# Altium PCB MYPCB.PcbDoc
Units mil, origin at the board's own origin, x right, y up, seen from the top; angles counter-clockwise.
Board outline 6000 x 4000 mil, 2 copper layers (Top Layer, Bottom Layer); 56 components, 75 nets, 228 pads, 46 vias.
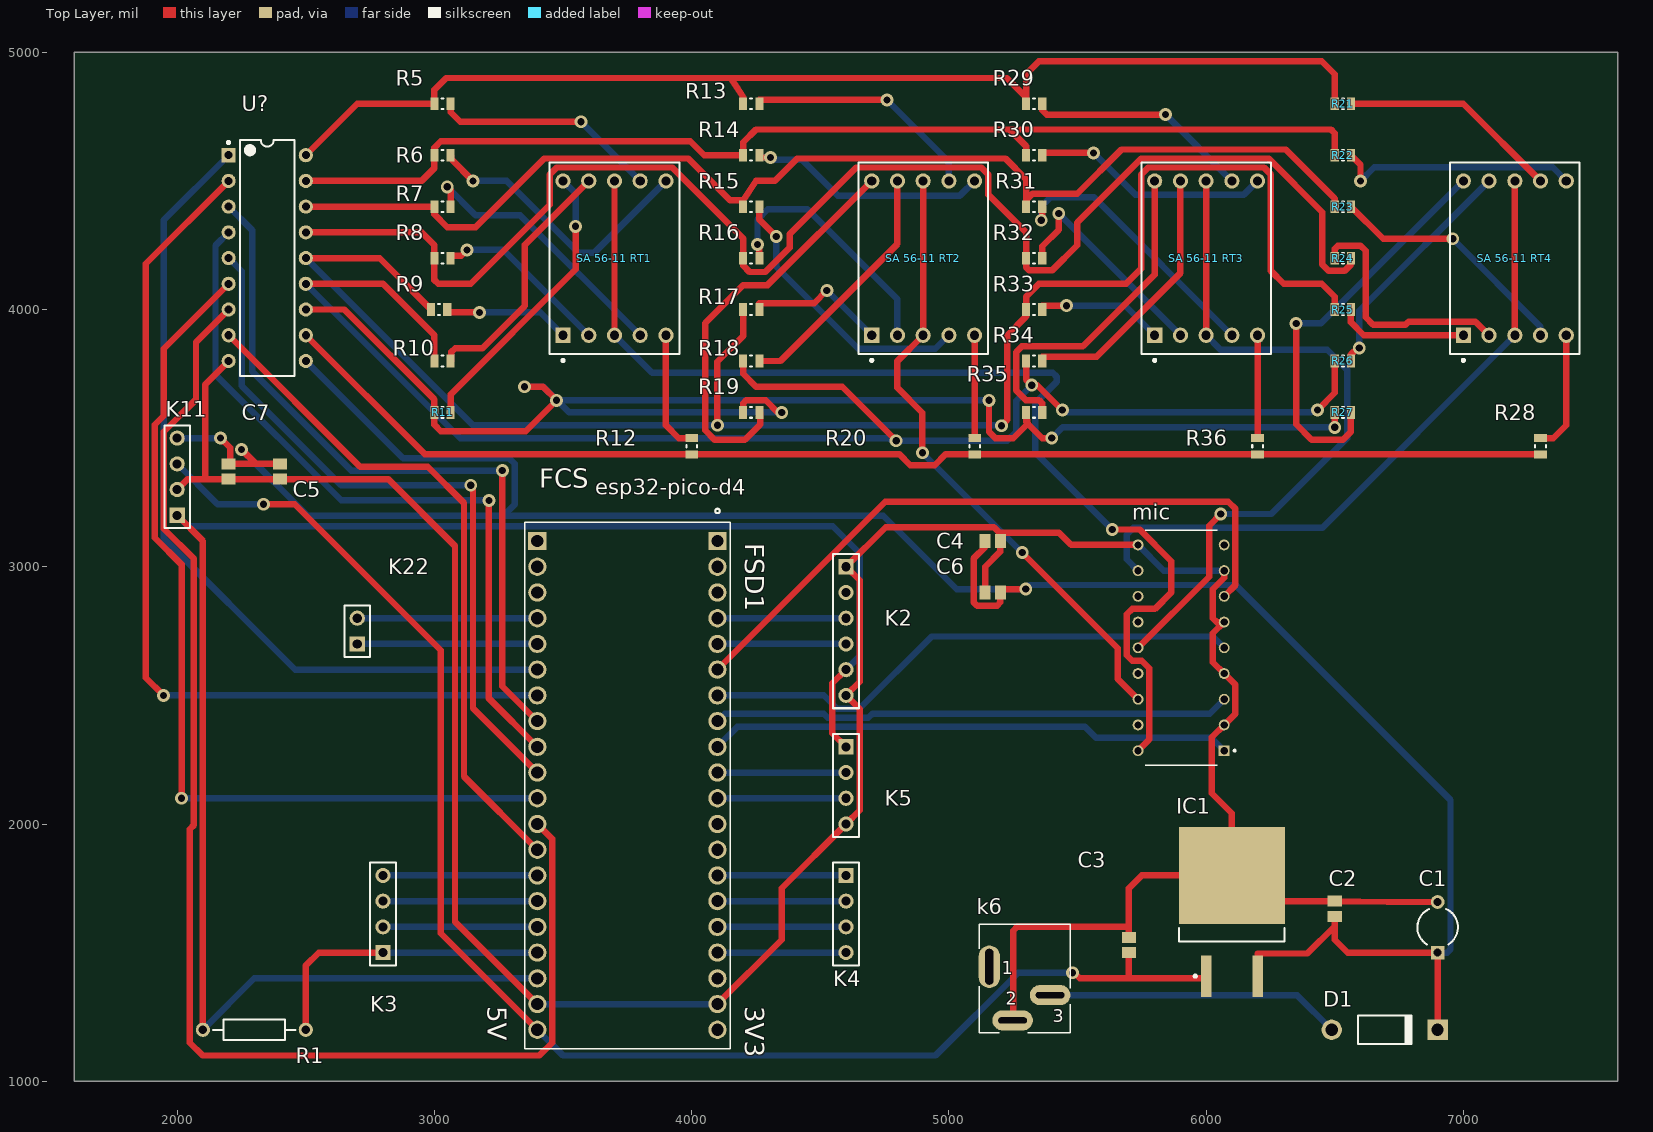
[diagram p0: Top Layer view]
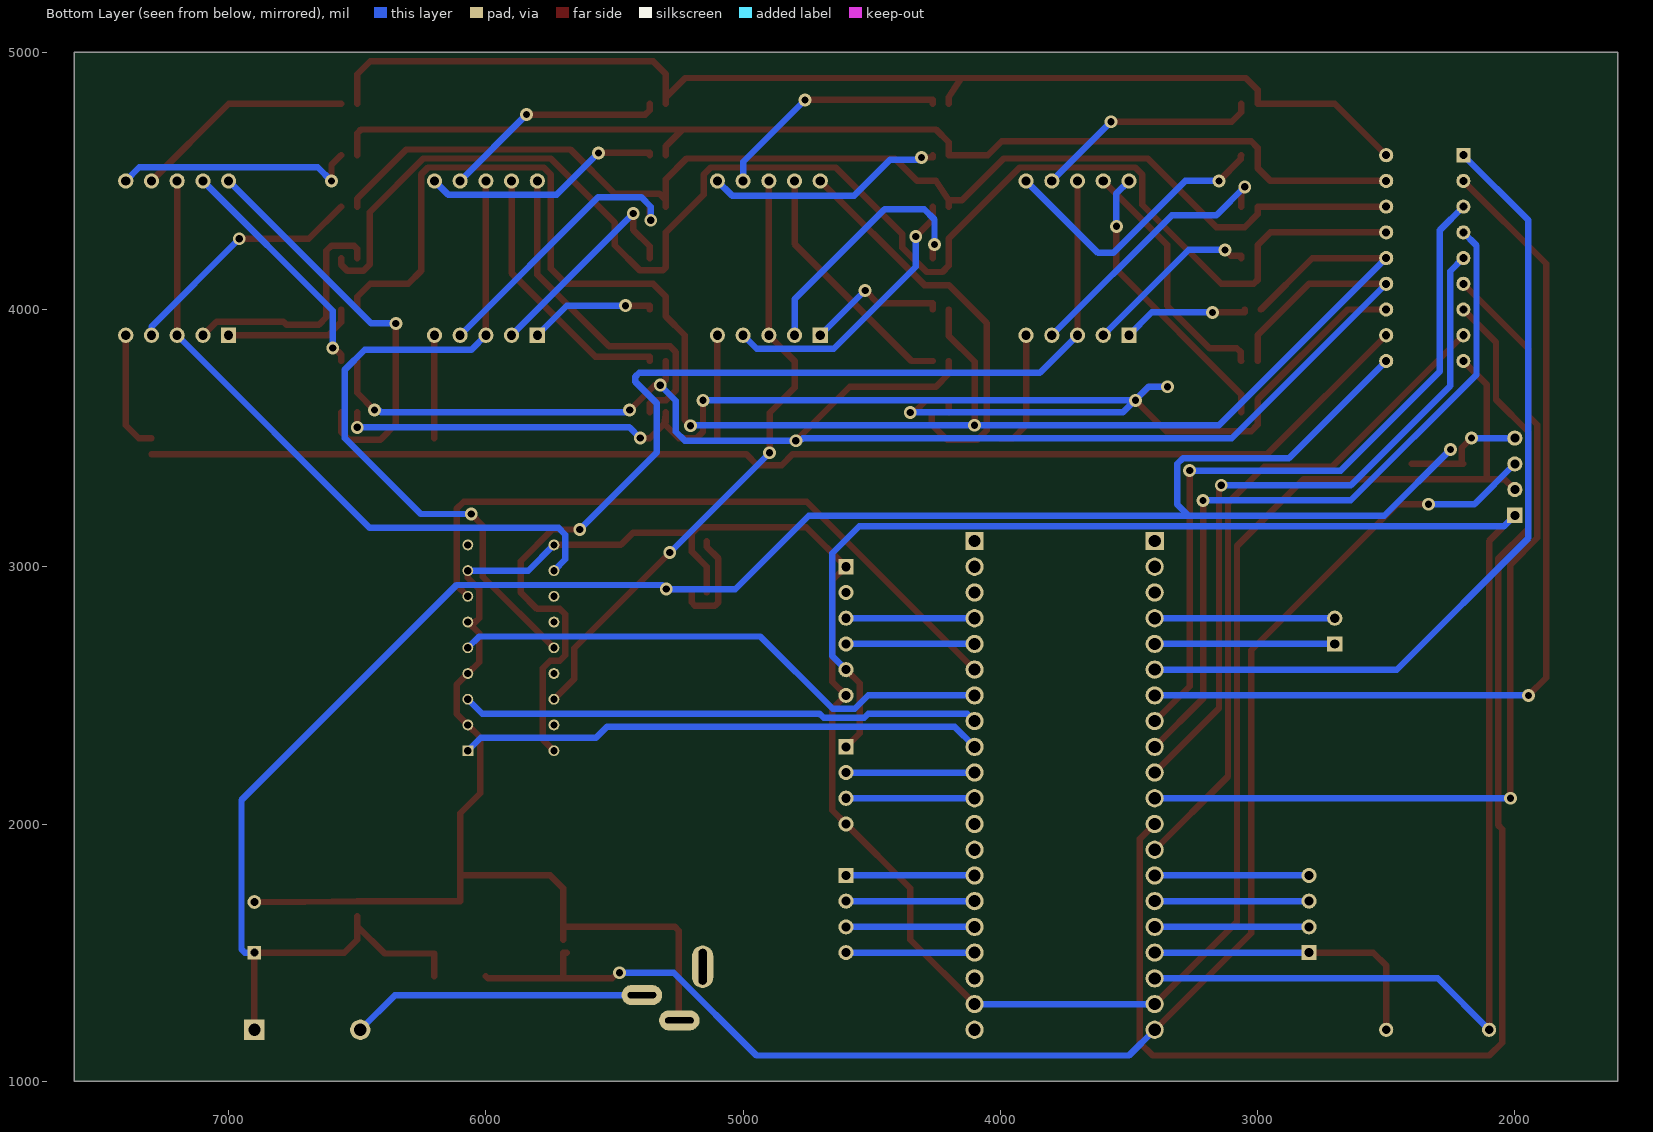
[diagram p1: Bottom Layer view, seen from below]

## Layer stack, top to bottom
Top Solder: solder mask 0.4, Solder Resist, Dk 3.5
Top Layer: signal copper 1.4
Dielectric 1: dielectric 12.6, FR-4, Dk 4.8
Bottom Layer: signal copper 1.4
Bottom Solder: solder mask 0.4, Solder Resist, Dk 3.5

## Board outline
1600,1000 7600,1000 7600,5000 1600,5000

## Design rules (kind name [scope] priority, off if disabled: settings)
Clearance [All] p1: gap=10 ignorepadtopadclearanceinfootprint=FALSE except(0: Arc-Hole Track-Hole SMDPad-Hole THPad-Hole Via-Hole Fill-Hole Poly-Hole Region-Hole Text-Hole)
PolygonConnect [All] p1: connectstyle=Relief reliefconductorwidth=10 reliefentries=4 polygonreliefangle="90 Angle" airgapwidth=10
RoutingVias [All] p1: holewidth=28 width=50 viastyle="Through Hole" minholewidth=28 minwidth=50 maxholewidth=28 maxwidth=50
SolderMaskExpansion [All] p1: expansion=4 istentingtop=FALSE
Width [All] p1: maxlimit=30 minlimit=10 preferedwidth=15 minimp=50.000000 maximp=50.000000 favimp=50.000000
30 further rules are at their usual default settings.

## Components (designator, comment, footprint, x,y, rotation, side; value= is the part's Value field where it differs from the comment)
C1 "Cap Pol1" CAPR5-4X5 6900,1598.42 r90 top value=100μF
C2 "Cap Pol3" C0805 6500,1670.47 r90 top value=330nF
C3 "Cap Pol3" C0805 5700,1529.53 r90 top value=100nF
C4 "Cap Pol3" C0805 5170.47,3100 r0 top value=1μF
C5 "Cap Pol3" C0805 2400,3370.47 r270 top value=1μ
C6 "Cap Pol3" C0805 5170.47,2900 r180 top value=100nF
C7 "Cap Pol3" C0805 2200,3370.47 r270 top value=100nF
D1 "Diode" DO-41 6694.09,1200 r0 top
esp32-pico-d4 "esp32-pico-d4" esp32picod4 3730,2155 r270 top
IC1 "L7805CD2T-TR" TO-263_M 6100,1658.27 r90 top
K2 "Header 6" HDR1X6 4600,3000 r270 top
K3 "Header 4" HDR1X4 2800,1500 r90 top
K4 "Header 4" HDR1X4 4600,1800 r270 top
K5 "Header 4" HDR1X4 4600,2300 r270 top
k6 "k6" k6 5300,1400 r0 top
K11 "Header 4" HDR1X4 2000,3200 r90 top
K22 "Header 2" HDR1X2 2700,2700 r90 top
mic "MIC2981" MIC2981 5900,2700 r180 top
R1 "Res2" AXIAL-0.4 2300,1200 r0 top value=1K
R5 "Res2" smd43 3031.5,4800 r0 top value=43Ω
R6 "Res2" smd43 3031.5,4600 r0 top value=43Ω
R7 "Res2" smd43 3031.5,4400 r0 top value=43Ω
R8 "Res2" smd43 3031.5,4200 r0 top value=43Ω
R9 "Res2" smd43 3018.5,4000 r0 top value=43Ω
R10 "Res2" smd43 3031.5,3800 r0 top value=43Ω
R11 "Res2" smd43 3031.5,3600 r0 top value=43Ω
R12 "Res2" smd43 4000,3468.5 r90 top value=680Ω
R13 "Res2" smd43 4231.5,4800 r0 top value=43Ω
R14 "Res2" smd43 4231.5,4600 r0 top value=43Ω
R15 "Res2" smd43 4231.5,4400 r0 top value=43Ω
R16 "Res2" smd43 4231.5,4200 r0 top value=43Ω
R17 "Res2" smd43 4231.5,4000 r0 top value=43Ω
R18 "Res2" smd43 4231.5,3800 r0 top value=43Ω
R19 "Res2" smd43 4231.5,3600 r0 top value=43Ω
R20 "Res2" smd43 5100,3468.5 r90 top value=680Ω
R21 "Res2" smd43 6531.5,4800 r0 top value=43Ω
R22 "Res2" smd43 6531.5,4600 r0 top value=43Ω
R23 "Res2" smd43 6531.5,4400 r0 top value=43Ω
R24 "Res2" smd43 6531.5,4200 r180 top value=43Ω
R25 "Res2" smd43 6531.5,4000 r0 top value=43Ω
R26 "Res2" smd43 6531.5,3800 r0 top value=43Ω
R27 "Res2" smd43 6531.5,3600 r0 top value=43Ω
R28 "Res2" smd43 7300,3468.5 r90 top value=680Ω
R29 "Res2" smd43 5331.5,4800 r0 top value=43Ω
R30 "Res2" smd43 5331.5,4600 r0 top value=43Ω
R31 "Res2" smd43 5331.5,4400 r0 top value=43Ω
R32 "Res2" smd43 5331.5,4200 r0 top value=43Ω
R33 "Res2" smd43 5331.5,4000 r0 top value=43Ω
R34 "Res2" smd43 5331.5,3800 r0 top value=43Ω
R35 "Res2" smd43 5331.5,3600 r0 top value=43Ω
R36 "Res2" smd43 6200,3468.5 r90 top value=680Ω
"SA 56-11 RT1" "Dpy Blue-CA" H 3700,4200 r0 top
"SA 56-11 RT2" "Dpy Blue-CA" H 4900,4200 r0 top
"SA 56-11 RT3" "Dpy Blue-CA" H 6000,4200 r0 top
"SA 56-11 RT4" "Dpy Blue-CA" H 7200,4200 r0 top
U? "ULN2803A" STM-DIP-18 2350,4200 r0 top

## Footprints (in the part's own frame and the unit in brackets; to place one, negate y for a bottom-side part, rotate by r counter-clockwise, add the part's x,y. Pads: shape width x height; smd on the part's side, far side on the other; paste and mask are expansions set on the pad)
AXIAL-0.4 [mm] "Axial Device, Thru-Hole; 2 Leads; 0.4 in Pin Spacing"
  round 1.4 hole 0.85: 1(-5.08,0) 2(5.08,0)
  silkscreen extent -4.06,-1.02 4.06,1.02
C0805 [mm] "Chip Capacitor, Body 2.0x1.3mm, IPC High Density"
  rect 1.1x1.4 smd: 1(-0.75,0) 2(0.75,0)
  body extent -1.1,-0.72 1.1,0.72, height 1.4
CAPR5-4X5 [mm] "Capacitor; 2 Leads"
  rect 1.35x1.35 hole 0.8: 1(-2.5,0)
  round 1.35 hole 0.8: 2(2.5,0)
  silkscreen extent -1.69,-2 1.82,2
DO-41 [mm] "Diode, Axial; Body 5.2 x 2.7 mm (LxDia. max), Lead Dia. 0.86 mm (max)"
  round 2 hole 1.2: 1(-5.23,0)
  rect 2x2 hole 1.2: 2(5.23,0)
  silkscreen extent -2.65,-1.4 2.75,1.4
esp32picod4 [mm]
  rect 1.8x1.8 hole 1.2: 1(-24.003,-8.382) 40(-24.003,9.398)
  round 1.8 hole 1.2: 2(-21.463,-8.382) 3(-18.923,-8.382) 4(-16.383,-8.382) 5(-13.843,-8.382) 6(-11.303,-8.382) 7(-8.763,-8.382) 8(-6.223,-8.382) 9(-3.683,-8.382) 10(-1.143,-8.382) 11(1.397,-8.382) 12(3.937,-8.382) 13(6.477,-8.382) 14(9.017,-8.382) 15(11.557,-8.382) 16(14.097,-8.382) 17(16.637,-8.382) 18(19.177,-8.382) 19(21.717,-8.382) 20(24.257,-8.382) 21(24.257,9.398) 22(21.717,9.398) 23(19.177,9.398) 24(16.637,9.398) 25(14.097,9.398) 26(11.557,9.398) 27(9.017,9.398) 28(6.477,9.398) 29(3.937,9.398) 30(1.397,9.398) 31(-1.143,9.398) 32(-3.683,9.398) 33(-6.223,9.398) 34(-8.763,9.398) 35(-11.303,9.398) 36(-13.843,9.398) 37(-16.383,9.398) 38(-18.923,9.398) 39(-21.463,9.398)
  silkscreen extent -27.2,-9.64 26.13,10.66
H [mm] "LED, 7-Segment Display, 14.2 mm, RHD; 10 Leads; Row Space 15.24 mm; Pitch 2.54 mm"
  rect 1.5x1.5 hole 0.9: 1(-5.08,-7.62)
  round 1.5 hole 0.9: 2(-2.54,-7.62) 3(0,-7.62) 4(2.54,-7.62) 5(5.08,-7.62) 6(5.08,7.62) 7(2.54,7.62) 8(0,7.62) 9(-2.54,7.62) 10(-5.08,7.62)
  silkscreen extent -6.4,-10.22 6.4,9.45, body extent -6.4,-9.45 6.4,9.45, height 8.25
HDR1X2 [mm] "Connector; Header; 2 Position"
  rect 1.5x1.5 hole 0.9: 1(0,0)
  round 1.5 hole 0.9: 2(2.54,0)
  silkscreen extent -1.27,-1.27 3.81,1.27
HDR1X4 [mm] "Connector; Header; 4 Position"
  rect 1.5x1.5 hole 0.9: 1(0,0)
  round 1.5 hole 0.9: 2(2.54,0) 3(5.08,0) 4(7.62,0)
  silkscreen extent -1.27,-1.27 8.89,1.27
HDR1X6 [mm] "Connector; Header; 6 Position"
  rect 1.5x1.5 hole 0.9: 1(0,0)
  round 1.5 hole 0.9: 2(2.54,0) 3(5.08,0) 4(7.62,0) 5(10.16,0) 6(12.7,0)
  silkscreen extent -1.27,-1.27 13.97,1.27
k6 [mm]
  oval 2.1x4.2 hole 0.8 slot 3.52 at 90 deg: 1(-3.627,1.143)
  oval 4x2 hole 0.6 slot 2.82 at 0 deg: 2(-1.327,-4.157) 3(2.373,-1.657)
  silkscreen extent -4.63,-5.36 4.37,5.34
MIC2981 [mm]
  rect 1.07x1.07 hole 0.72: 1(-4.318,10.541)
  round 1.07 hole 0.72: 2(-4.318,8.001) 3(-4.318,5.461) 4(-4.318,2.921) 5(-4.318,0.381) 6(-4.318,-2.159) 7(-4.318,-4.699) 8(-4.318,-7.239) 9(-4.318,-9.779) 10(4.182,-9.779) 11(4.182,-7.239) 12(4.182,-4.699) 13(4.182,-2.159) 14(4.182,0.381) 15(4.182,2.921) 16(4.182,5.461) 17(4.182,8.001) 18(4.182,10.541)
  silkscreen extent -5.45,-11.24 3.48,12
smd43 [mm]
  rect 0.8x1.25 smd: 1(-0.8,0) 2(0.8,0)
  silkscreen extent -0.1,-0.53 0.1,0.53, body extent -1.05,-0.67 1.05,0.67, height 0.6
STM-DIP-18 [mm] "DIP, 18-Leads, Body 23.25x7.1mm, Pitch 2.54mm"
  rect 1.4x1.4 hole 0.8: 1(-3.81,10.16)
  round 1.4 hole 0.8: 2(-3.81,7.62) 3(-3.81,5.08) 4(-3.81,2.54) 5(-3.81,0) 6(-3.81,-2.54) 7(-3.81,-5.08) 8(-3.81,-7.62) 9(-3.81,-10.16) 10(3.81,-10.16) 11(3.81,-7.62) 12(3.81,-5.08) 13(3.81,-2.54) 14(3.81,0) 15(3.81,2.54) 16(3.81,5.08) 17(3.81,7.62) 18(3.81,10.16)
  silkscreen extent -3.93,-11.65 2.7,11.65, body extent -3.93,-11.63 3.93,11.63, height 3.93
TO-263_M [mm] "D2-PAK, 4-Leads, Body 9.2x10.2mm, Pitch 2.54mm, Lead Span 15.4mm, IPC Low Density"
  rect 4.1x1.05 smd: 1(-6.35,2.54) 3(-6.35,-2.54)
  rect 9.6x10.45 smd: 4(3.6,0)
  silkscreen extent -6.47,-5.2 -1.6,5.2, body extent -2.9,-5.2 6.45,5.2, height 4.6

## Part data
C1: "Polarized Capacitor (Radial)", LatestRevisionDate=17-Jul-2002, LatestRevisionNote="Re-released for DXP Platform.", PackageDescription="Polarized Capacitor (Radial); 2 Leads", PackageReference=RB7.6-15, Published=8-Jun-2000, Publisher="Altium Limited"
C2 C3 C4 C5 C6 C7: "Polarized Capacitor (Surface Mount)", LatestRevisionDate=29-May-2009, LatestRevisionNote="IPC-7351 Footprint Added.", PackageDescription="Chip Capacitor", PackageReference=C0805, Published=8-Jun-2000, Publisher="Altium Limited"
D1: library part "Diode 1N4002", "1 Amp General Purpose Rectifier", Code_JEDEC=DO-204-AL, ComponentLink1Description="Manufacturer Link", ComponentLink1URL=http://www.fairchildsemi.com/, ComponentLink2Description=Datasheet, ComponentLink2URL=http://www.fairchildsemi.com/ds/1N%2F1N4001.pdf, DatasheetVersion=1998, LatestRevisionDate=17-Jul-2002, LatestRevisionNote="Re-released for DXP Platform.", PackageDescription="Diode, Axial; Body 5.2 x 2.7 mm (LxDia. max), Lead Dia. 0.86 mm (max)", PackageReference=DO-41, PackageVersion=Aug-1999, Published=8-Jun-2000, Publisher="Altium Limited"
esp32-pico-d4: library part "picoESP32-PICO-KIT V"
IC1: library part CMP-0244-00213-1, "Positive Voltage Regulator, 3-Pin D2PAK, Tape and Reel", ComponentLink1Description="Manufacturer URL", ComponentLink1URL=http://www.st.com, ComponentLink2Description=Datasheet, ComponentLink2URL=http://www.st.com/internet/com/TECHNICAL_RESOURCES/TECHNICAL_LITERATURE/DATASHEET/CD00000444.pdf, DatasheetVersion=16/11/2011, PackageDescription="3-Pin Transistor Outline Package 2.54 mm Pitch, 15.4 mm Lead Span (D2PAK)", PackageReference=TO-263, PackageVersion=2011
K2: "Header, 6-Pin", LatestRevisionDate=17-Jul-2002, LatestRevisionNote="Re-released for DXP Platform.", Publisher="Altium Limited"
K3 K4 K5 K11: "Header, 4-Pin", LatestRevisionDate=17-Jul-2002, LatestRevisionNote="Re-released for DXP Platform.", Publisher="Altium Limited"
K22: "Header, 2-Pin", LatestRevisionDate=17-Jul-2002, LatestRevisionNote="Re-released for DXP Platform.", Publisher="Altium Limited"
R1 R5 R6 R7 R8 R9 R10 R11 R12 R13 R14 R15 R16 R17 R18 R19 R20 R21 R22 R23 R24 R25 R26 R27 R28 R29 R30 R31 R32 R33 R34 R35 R36: "Resistor", LatestRevisionDate=17-Jul-2002, LatestRevisionNote="Re-released for DXP Platform.", PackageDescription="Axial Device, Thru-Hole; 2 Leads; 0.4 in Pin Spacing", PackageReference=AXIAL-0.4, Published=8-Jun-2000, Publisher="Altium Limited"
"SA 56-11 RT1": "14.2 mm General Purpose Blue 7-Segment Display: CA, RH DP, Gray Surface", Colour=Blue, ComponentLink1Description="Manufacturer Link", ComponentLink1URL=http://www.agilent.com/, DatasheetVersion=24-Sep-2002, LatestRevisionDate=17-Dec-2003, LatestRevisionNote="Schematic revised, PCB Footprint replaced.", MinimumIntensity="2020 ucd", Note="IF = 10 mA", PackageDescription="LED, 7-Segment Display, 14.2 mm, RHD; 10 Leads; Row Space 15.24 mm; Pitch 2.54 mm", PackageReference=H, PackageVersion=24-Sep-2002, Published=8-Jun-2000, Publisher="Altium Limited"
"SA 56-11 RT2" "SA 56-11 RT3" "SA 56-11 RT4": "14.2 mm General Purpose Blue 7-Segment Display: CA, RH DP, Gray Surface", Colour=red, ComponentLink1Description="Manufacturer Link", ComponentLink1URL=http://www.agilent.com/, DatasheetVersion=24-Sep-2002, LatestRevisionDate=17-Dec-2003, LatestRevisionNote="Schematic revised, PCB Footprint replaced.", MinimumIntensity="2020 ucd", Note="IF = 10 mA", PackageDescription="LED, 7-Segment Display, 14.2 mm, RHD; 10 Leads; Row Space 15.24 mm; Pitch 2.54 mm", PackageReference=H, PackageVersion=24-Sep-2002, Published=8-Jun-2000, Publisher="Altium Limited"
U?: library part CMP-2000-05363-1, "Eight Darlington Arrays, 50 V, 2.25 W, 500 mA, 18-Pin DIP, RoHS, Tube", Collector Emitter Voltage V(br)ceo=50V, DC Collector Current=500mA, DC Current Gain hFE=1000hFE, Manufacturer=STMicroelectronics, Operating Temperature Max=85degC, Package Description="18-Pin Double In-line Package, Body 24.8 x 7.1 mm, Pitch 2.54 mm", Package Reference=DIP-18, Power Dissipation Pd=2.25W, Transistor Case Style=DIP, Automotive Qualification Standard=-, Datasheet URL=https://datasheet.ciiva.com/29306/171824-da-01-en-ic-uln2803-dil18-29306026.pdf, Datasheet Version=Sep-03, Manufacturer URL=http://www.st.com/, MSL=-, No. of Pins=18Pins, Product Range=-, SVHC=NoSVHC(17-Dec-2015), Transistor Polarity=NPN

## Via types
v1: diameter 50, hole 28, Top Layer to Bottom Layer, 46 vias

## Nets (pads, with @x,y where several pads share a name; then routed paths per layer and width w, separated by ;. In a path a pad name is that pad's centre, name@x,y a point inside that pad or via, vN(x,y) a via of type N, cw(c..) or ccw(c..) an arc to the next point about the centre after c; other vN are vias at no path point)
+3.3: esp32-pico-d4.18 K2.5 K5.1 K11.1 R1.1 | length 6957
  Top Layer w25: K11.1 2100,3100 R1.1 ; K5.1 4547,2353 4547,2547 K2.5
  Bottom Layer w25: K11.1 2042,3158 4548,3158 4653,3053 4653,2653 K2.5 ; R1.1 2300,1400 esp32-pico-d4.18
+5: C3.1 esp32-pico-d4.20 IC1.1 K11.3 | length 5858.1
  Top Layer w25: v1(2335,3243) 2457,3243 3025,2675 3025,1575 esp32-pico-d4.20 ; v1(5481,1422) 5486.14,1422 5508.14,1400 5700,1400 ; C3.1@5684.94,1500 C3.1 5700,1400 ; IC1.1 6000,1408.17 5991.83,1400 5700,1400
  Bottom Layer w25: K11.3 2157,3243 v1(2335,3243) ; esp32-pico-d4.20 3500,1100 4948,1100 5270,1422 v1(5481,1422)
+12: C1.1 C2.1 C4.1 C5.1 C6.1 C7.1 D1.2 IC1.3 K11.4 U?.10 | length 9440
  Top Layer w25: v1(2168.5,3500) 2206,3462.5 C7.1@2206,3400 ; C7.1 C7.1@2206,3400 ; v1(2250,3456) 2306,3400 ; C5.1 2306,3400 ; C4.1 5140.94,3077 5096,3032.06 5096,2862.5 5109.5,2849 5187.5,2849 5200,2861.5 C6.1 5200,2913 v1(5299,2913) ; IC1.3 6200,1496.5 6393.5,1496.5 6500,1603 ; C2.1 6500,1603 ; D1.2 C1.1 6550,1500 6500,1550 6500,1603 ; C7.1@2206,3400 2306,3400
  Bottom Layer w25: K11.4 v1(2168.5,3500) ; v1(2250,3456) 2508,3198 3268,3198 ; U?.10 2878,3422 3290,3422 3312,3400 3312,3242 3268,3198 ; C1.1 6937.5,1500 6950,1512.5 6950,2093 6114,2929 5315,2929 v1(5299,2913) 5030,2913 4745,3198 3268,3198
+VIN: D1.1 k6.3 | length 1150.6
  Bottom Layer w25: k6.3 6353.42,1334.76 D1.1
GND: C1.2 C2.2 C3.2 C4.2 C5.2 C6.2 C7.2 esp32-pico-d4.19 esp32-pico-d4.22 IC1.4 K2.1 K2.6 K5.4 k6.2 K11.2 mic.2 mic.4 mic.6 mic.8 mic.10 U?.9 | length 11862.1
  Top Layer w25: K11.2 2040.94,3340.94 2109.06,3340.94 ; U?.9 2108.5,3708.5 2108.5,3341.5 2109.06,3340.94 ; esp32-pico-d4.19 3080,1620 3080,3080.94 2820,3340.94 C5.2 C7.2 2109.06,3340.94 ; esp32-pico-d4.22 4350,1550 4350,1750 K5.4 4653,2053 4653,2447 K2.6 4653,2553 4653,2947 K2.1 4754,3154 5175,3154 5200,3129 ; C6.2 5140.94,3000 5200,3059.06 C4.2 5200,3129 ; k6.2 5250,1238.58 5250,1585.36 5264.64,1600 5700,1600 ; C3.2@5700,1550 5700,1600 ; mic.10 5475,3085 5427.95,3132.05 5200,3132.05 5200,3129 ; mic.8 6070,2957 6026,2913 6026,2800 6041,2785 mic.6 6026,2741 6026,2629 mic.4 6114,2541 6114,2429 mic.2 6022,2337 6022,2120 6100,2042 IC1.4 ; C1.2 6703.15,1696.85 C2.2 6100,1700 IC1.4 ; 5700,1600 5700,1650 5700,1750 5750,1800 IC1.4
  Bottom Layer w25: esp32-pico-d4.19 esp32-pico-d4.22 ; mic.10 5835.35,2985 mic.8
I1: esp32-pico-d4.6 U?.1 | length 3257.9
  Bottom Layer w25: U?.1 1947,4347 1947,3112 2459,2600 esp32-pico-d4.6
I2: esp32-pico-d4.7 U?.2 | length 3615
  Top Layer w25: v1(1947,2500) 1877.97,2569.03 1877.97,4177.97 U?.2
  Bottom Layer w25: v1(1947,2500) esp32-pico-d4.7
I3: esp32-pico-d4.8 U?.3 | length 2840.9
  Top Layer w25: v1(3264,3374) 3264,2536 esp32-pico-d4.8
  Bottom Layer w25: U?.3 2291,4309 2291,3760 2677,3374 v1(3264,3374)
I4: esp32-pico-d4.9 U?.4 | length 2875.5
  Top Layer w25: v1(3212,3258) 3212,2488 esp32-pico-d4.9
  Bottom Layer w25: U?.4 2149,4249 2149,3747 2638,3258 v1(3212,3258)
I5: esp32-pico-d4.10 U?.5 | length 2792.3
  Top Layer w25: v1(3141,3317) 3150,3308 3150,2450 esp32-pico-d4.10
  Bottom Layer w25: U?.5 2251,4149 2251,3703 2637,3317 v1(3141,3317)
I6: esp32-pico-d4.11 U?.6 | length 3545
  Top Layer w25: v1(2017,2100) 2017,3008.94 1912.97,3112.97 1912.97,3552.03 1947.97,3587.03 1947.97,3847.97 U?.6
  Bottom Layer w25: v1(2017,2100) esp32-pico-d4.11
I7: esp32-pico-d4.12 U?.7 | length 5333.9
  Top Layer w25: U?.7 2073,3873 2073,3650.03 1947.97,3525 1947.97,3147.97 2065,3030.94 2065,1996 2049,1980 2049,1150 2099,1100 3408,1100 3458,1150 3458,1942 esp32-pico-d4.12
I8: esp32-pico-d4.13 U?.8 | length 2651.1
  Top Layer w25: U?.8 2711,3389 2974,3389 3115,3248 3115,2185 esp32-pico-d4.13
Netesp32-pico-d4_4: esp32-pico-d4.4 K22.2 | length 700
  Bottom Layer w25: K22.2 esp32-pico-d4.4
Netesp32-pico-d4_5: esp32-pico-d4.5 K22.1 | length 700
  Bottom Layer w25: K22.1 esp32-pico-d4.5
Netesp32-pico-d4_14: esp32-pico-d4.14 K3.4 | length 600
  Bottom Layer w25: K3.4 esp32-pico-d4.14
Netesp32-pico-d4_15: esp32-pico-d4.15 K3.3 | length 600
  Bottom Layer w25: K3.3 esp32-pico-d4.15
Netesp32-pico-d4_16: esp32-pico-d4.16 K3.2 | length 600
  Bottom Layer w25: K3.2 esp32-pico-d4.16
Netesp32-pico-d4_17: esp32-pico-d4.17 K3.1 R1.2 | length 1170.7
  Top Layer w25: R1.2 2500,1450 2550,1500 K3.1
  Bottom Layer w25: K3.1 esp32-pico-d4.17
Netesp32-pico-d4_24: esp32-pico-d4.24 K4.4 | length 500
  Bottom Layer w25: esp32-pico-d4.24 K4.4
Netesp32-pico-d4_25: esp32-pico-d4.25 K4.3 | length 500
  Bottom Layer w25: esp32-pico-d4.25 K4.3
Netesp32-pico-d4_26: esp32-pico-d4.26 K4.2 | length 500
  Bottom Layer w25: esp32-pico-d4.26 K4.2
Netesp32-pico-d4_27: esp32-pico-d4.27 K4.1 | length 500
  Bottom Layer w25: esp32-pico-d4.27 K4.1
Netesp32-pico-d4_30: esp32-pico-d4.30 K5.3 | length 500
  Bottom Layer w25: esp32-pico-d4.30 K5.3
Netesp32-pico-d4_31: esp32-pico-d4.31 K5.2 | length 500
  Bottom Layer w25: esp32-pico-d4.31 K5.2
Netesp32-pico-d4_32: esp32-pico-d4.32 mic.1 | length 2040.8
  Bottom Layer w25: esp32-pico-d4.32 4177.97,2377.97 5529.03,2377.97 5572,2335 6020,2335 mic.1
Netesp32-pico-d4_33: esp32-pico-d4.33 mic.3 | length 2018.5
  Bottom Layer w25: esp32-pico-d4.33 4129,2429 4512.97,2429 4529,2412.97 4687.03,2412.97 4703.06,2429 6014,2429 mic.3
Netesp32-pico-d4_34: esp32-pico-d4.34 mic.5 | length 2126.2
  Bottom Layer w25: esp32-pico-d4.34 4514,2500 4566.03,2447.97 4652,2447.97 4933.03,2729 6026,2729 mic.5
Netesp32-pico-d4_35: esp32-pico-d4.35 mic.7 | length 2654.3
  Top Layer w25: esp32-pico-d4.35 4753,3253 6086,3253 6114,3225 6114,2929 mic.7
Netesp32-pico-d4_36: esp32-pico-d4.36 K2.4 | length 500
  Bottom Layer w25: esp32-pico-d4.36 K2.4
Netesp32-pico-d4_37: esp32-pico-d4.37 K2.3 | length 500
  Bottom Layer w25: esp32-pico-d4.37 K2.3
Netmic_11: "SA 56-11 RT4.3" "SA 56-11 RT4.8" mic.11 | length 2588.4
  Top Layer w25: 7200,3900 7200,4500
  Bottom Layer w25: mic.11 5691,3029.35 5691,3125 5717,3151 6451,3151 7200,3900
Netmic_14: "SA 56-11 RT3.3" "SA 56-11 RT3.8" mic.14 | length 2736.4
  Top Layer w25: mic.14 6012,2961.65 6012,3160 v1(6057,3205) ; 6000,3900 6000,4500
  Bottom Layer w25: 6000,3900 6056,3844 6470.88,3844 6548,3766.88 6548,3500 6253,3205 v1(6057,3205)
Netmic_16: "SA 56-11 RT2.3" "SA 56-11 RT2.8" mic.16 | length 2443.9
  Top Layer w25: v1(4897,3443) 4897,3599 4800,3696 4800,3800 4900,3900 4900,4500 ; v1(5285,3055) 5656.79,2683.21 5656.79,2563.56 mic.16
  Bottom Layer w25: v1(4897,3443) v1(5285,3055)
Netmic_18: "SA 56-11 RT1.3" "SA 56-11 RT1.8" mic.18 | length 4355.9
  Top Layer w25: 3700,3900 3700,4500 ; v1(5635,3145) 5742,3145 5865,3022 5865,2900 5801,2836 5712.5,2836 5691.79,2815.29 5691.79,2656.21 5713,2635 5750,2635 5779,2606 5779,2328.65 mic.18
  Bottom Layer w25: 3700,3900 3846,3754 5404,3754 5418.64,3739.36 5418.64,3718.64 5335,3635 5335,3445 v1(5635,3145)
O1: R5.1 R13.1 R21.1 R29.1 U?.18 | length 4574.7
  Top Layer w25: U?.18 2700,4800 R5.1 3000,4854 3046,4900 4152.53,4900 ; 4150,4900 4152.53,4900 ; R13.1 4200,4825 4190.31,4840.31 4152.53,4900 ; R29.1 5300,4825 ; R21.1 6500,4915 6450,4965 5350,4965 5300,4915 5300,4825 ; 4152.53,4900 5225,4900 5300,4825
O2: R6.1 R14.1 R22.1 R30.1 U?.17 | length 4506.8
  Top Layer w25: U?.17 2950,4500 3000,4550 R6.1 3000,4629 3025,4654 3995,4654 4049,4600 R14.1 4200,4650 4250,4700 5150,4700 ; R30.1 5300,4635.5 5235.5,4700 ; R22.1 6500,4685.36 6485.36,4700 5235.5,4700 ; 5150,4700 5235.5,4700 ; 5150,4700 5235.5,4700
O3: R7.1 R15.1 R23.1 R31.1 U?.16 | length 4661.8
  Top Layer w25: U?.16 R7.1 3000,4370 3050,4320 3160,4320 3427.03,4587.03 3987.03,4587.03 4149.06,4425 4200,4425 ; R15.1 4200,4425 ; R31.1 5300,4425 ; R23.1 6500,4431.42 6309.39,4622.03 5671.06,4622.03 5499.03,4450 5325,4450 5300,4425 ; 4200,4425 4250,4500 4323.52,4500 4410.54,4587.03 5219.97,4587.03 5300,4507 5300,4425
O4: R8.1 R16.1 R24.1 R32.1 U?.15 | length 5768
  Top Layer w25: U?.15 2950,4300 3000,4250 3000,4114.64 3014.64,4100 3141,4100 3447.97,4406.97 3447.97,4525 3475,4552.03 3923.97,4552.03 4200,4276 R16.1 4200,4171 4225,4146 4286,4146 4380.71,4240.71 4380.71,4292.47 4640.26,4552.03 5125.97,4552.03 5153,4525 5153,4447 5300,4300 R32.1 5300,4164.5 5312.5,4152 5401,4152 5499,4250 5499,4338.06 5747.97,4587.03 6243.73,4587.03 6452,4378.76 6452,4175 6477,4150 6537.99,4150 6562.99,4175 R24.1
O5: R9.1 R17.1 R25.1 R33.1 U?.14 | length 6677.5
  Top Layer w25: U?.14 2500,4199 2788.01,4199 R9.1 ; v1(4100,3550) 4100,3797 4200,3897 R17.1 ; v1(5204,3548) 5226.75,3570.75 5226.75,3900 5300,3973.25 R33.1 5300,4050 5350,4100 5688.75,4100 5747.97,4159.23 5747.97,4525 5775,4552.03 6225,4552.03 6252.03,4525 6252.03,4150 6302.03,4100 6450,4100 6500,4050 R25.1
  Bottom Layer w25: U?.14 3150,3550 v1(4100,3550) 5202,3550 v1(5204,3548)
O6: R10.1 R18.1 R26.1 R34.1 U?.13 | length 6151.1
  Top Layer w25: U?.13 2800,4100 3000,3900 R10.1 ; R18.1 4200,3750 4250,3700 4585,3700 v1(4795,3490) ; R34.1 5300,3728 v1(5322,3706) 5344,3706 v1(5441,3609) ; v1(6433,3609) 6500,3676 R26.1
  Bottom Layer w25: U?.13 3100,3500 4767.86,3500 4773.07,3494.78 4790.22,3494.78 v1(4795,3490) ; v1@4794.5,3490.5 5227,3490.5 5261.5,3525 5261.5,3645.5 v1(5322,3706) ; v1(5441,3609) 5447.76,3609 5456.76,3600 6406.32,3600 6410.54,3604.22 6428.22,3604.22 v1(6433,3609)
O7: R11.1 R19.1 R27.1 R35.1 U?.12 | length 6046
  Top Layer w25: U?.12 2650,4000 3000,3650 R11.1 3000,3552 3025,3527 3355,3527 v1(3475,3647) 3422,3700 v1(3350,3700) ; R19.1 4200,3635.5 4211.61,3647.11 4288.06,3647.11 4335.17,3600 v1(4350,3600) ; v1(5156,3647) 5156,3525 5181,3500 5250,3500 5306.5,3556.5 ; v1(5400,3500) 5363,3500 5306.5,3556.5 ; v1(6500,3542) R27.1 ; 5306.5,3556.5 R35.1 5300,3563 5306.5,3556.5
  Bottom Layer w25: v1(3350,3700) 3424,3700 3524,3600 v1(4350,3600) ; v1(3475,3647) v1(5156,3647) ; v1(5400,3500) 5442,3542 v1(6500,3542)
O8: R12.1 R20.1 R28.1 R36.1 U?.11 | length 5026.4
  Top Layer w25: U?.11 2962.99,3437.01 R12.1 4808,3437.01 4849.84,3395.17 4944.84,3395.17 4986.68,3437.01 R20.1 R36.1 R28.1
R5: "SA 56-11 RT1.7" R5.2 | length 880.6
  Top Layer w25: R5.2 3062.99,4767.01 3100,4730 v1(3570,4730)
  Bottom Layer w25: v1(3570,4730) 3800,4500
R6: "SA 56-11 RT1.6" R6.2 | length 1118
  Top Layer w25: R6.2 3066.24,4596.75 3066.24,4583.76 v1(3150,4500)
  Bottom Layer w25: v1(3150,4500) 3281,4500 3561,4220 3620,4220 3900,4500
R7: "SA 56-11 RT1.4" R7.2 | length 1071.4
  Top Layer w25: v1(3050,4477) 3062.99,4464.01 R7.2
  Bottom Layer w25: v1(3050,4477) 3160,4367 3333,4367 3800,3900
R8: "SA 56-11 RT1.2" R8.2 | length 693.1
  Top Layer w25: R8.2 3062.99,4209 3104,4209 v1(3127,4232)
  Bottom Layer w25: v1(3127,4232) 3268,4232 3600,3900
R9: "SA 56-11 RT1.1" R9.2 | length 497.9
  Top Layer w25: R9.2 3050,3989 v1(3175,3989)
  Bottom Layer w25: v1(3175,3989) 3411,3989 3500,3900
R10: "SA 56-11 RT1.9" R10.2 | length 984.6
  Top Layer w25: R10.2 3066.24,3803.25 3066.24,3835.36 3080.88,3850 3187,3850 3351,4014 3351,4251 3600,4500
R11: "SA 56-11 RT1.10" R11.2 | length 1121.6
  Top Layer w25: R11.2 3062.99,3670 3549,4156.01 v1(3549,4323.43)
  Bottom Layer w25: 3500,4500 3549,4451 v1(3549,4323.43)
R12: "SA 56-11 RT1.5" R12.2 | length 470.7
  Top Layer w25: 3900,3900 3900,3550 3950,3500 R12.2
R13: "SA 56-11 RT2.7" R13.2 | length 925.8
  Top Layer w25: R13.2 4262.99,4815 v1(4759,4815)
  Bottom Layer w25: v1(4759,4815) 5000,4574 5000,4500
R14: "SA 56-11 RT2.6" R14.2 | length 935.6
  Top Layer w25: R14.2 4262.99,4591 v1(4307,4591)
  Bottom Layer w25: v1(4307,4591) 4307,4583 4428,4583 4568,4443 5043,4443 5100,4500
R15: "SA 56-11 RT2.4" R15.2 | length 1086.4
  Top Layer w25: R15.2 4262.99,4350 v1(4329,4283.99)
  Bottom Layer w25: v1(4329,4283.99) 4329,4166 4648,3847 4947,3847 5000,3900
R16: "SA 56-11 RT2.2" R16.2 | length 998.4
  Top Layer w25: v1(4256,4253) 4262.99,4246.01 R16.2
  Bottom Layer w25: v1(4256,4253) 4256,4350 4296,4390 4450,4390 4800,4040 4800,3900
R17: "SA 56-11 RT2.1" R17.2 | length 554.8
  Top Layer w25: R17.2 4262.99,4025 4476,4025 v1(4525.5,4074.5)
  Bottom Layer w25: v1(4525.5,4074.5) 4700,3900
R18: "SA 56-11 RT2.9" R18.2 | length 970.5
  Top Layer w25: R18.2 4345,3800 4800,4255 4800,4500
R19: "SA 56-11 RT2.10" R19.2 | length 1595
  Top Layer w25: R19.2 4266.24,3596.75 4266.24,3574.08 4266.3,3574.02 4266.3,3553.31 4206.99,3494 4088.82,3494 4052.5,3530.32 4052.5,3947.5 4200,4095 4295,4095 4700,4500
R20: "SA 56-11 RT2.5" R20.2 | length 400
  Top Layer w25: R20.2 5100,3900
R21: "SA 56-11 RT4.7" R21.2 | length 861.3
  Top Layer w25: R21.2 7000,4800 7300,4500
R22: "SA 56-11 RT4.6" R22.2 | length 959.2
  Top Layer w25: R22.2 6600,4562.99 v1(6600,4500)
  Bottom Layer w25: v1(6600,4500) 6653,4553 7347,4553 7400,4500
R23: "SA 56-11 RT4.4" R23.2 | length 963.7
  Top Layer w25: R23.2 6688,4274.99 v1(6958.51,4274.99)
  Bottom Layer w25: v1(6958.51,4274.99) 7300,3933.5 7300,3900
R24: "SA 56-11 RT4.2" R24.2 | length 945.9
  Top Layer w25: R24.2 6500,4235.5 6512.5,4248 6600,4248 6620,4228 6620,3970 6649,3941 6775,3941 6787,3953 7047,3953 7100,3900
R25: "SA 56-11 RT4.1" R25.2 | length 507.7
  Top Layer w25: R25.2 6562.99,3950 6612.99,3900 7000,3900
R26: "SA 56-11 RT4.9" R26.2 | length 926
  Top Layer w25: R26.2 6562.99,3825 6588.99,3851 v1(6595,3851)
  Bottom Layer w25: v1(6595,3851) 6595,3995 7100,4500
R27: "SA 56-11 RT4.10" R27.2 | length 1597.2
  Top Layer w25: v1(6350,3946) 6350,3554 6410,3494 6531.99,3494 6562.99,3525 R27.2
  Bottom Layer w25: v1(6350,3946) 6446,3946 7000,4500
R28: "SA 56-11 RT4.5" R28.2 | length 470.7
  Top Layer w25: R28.2 7350,3500 7400,3550 7400,3900
R29: "SA 56-11 RT3.7" R29.2 | length 875.9
  Top Layer w25: R29.2 5362.99,4775 5379.99,4758 v1(5842,4758)
  Bottom Layer w25: v1(5842,4758) 6100,4500
R30: "SA 56-11 RT3.6" R30.2 | length 935.1
  Top Layer w25: R30.2 5362.99,4609 v1(5562,4609)
  Bottom Layer w25: v1(5562,4609) 5724,4447 6147,4447 6200,4500
R31: "SA 56-11 RT3.4" R31.2 | length 1085.6
  Top Layer w25: v1(5359,4347) 5362.99,4350.99 R31.2
  Bottom Layer w25: v1(5359,4347) 5359,4400 5395,4436 5564,4436 6100,3900
R32: "SA 56-11 RT3.2" R32.2 | length 868.4
  Top Layer w25: R32.2 5362.99,4245.51 5427,4309.52 v1(5427,4373)
  Bottom Layer w25: v1(5427,4373) 5900,3900
R33: "SA 56-11 RT3.1" R33.2 | length 499.6
  Top Layer w25: R33.2 5362.99,4015 v1(5457,4015)
  Bottom Layer w25: v1(5457,4015) 5685,4015 5800,3900
R34: "SA 56-11 RT3.9" R34.2 | length 1046
  Top Layer w25: R34.2 5362.99,3816 5574,3816 5900,4142 5900,4500
R35: "SA 56-11 RT3.10" R35.2 | length 1333.6
  Top Layer w25: R35.2 5362.99,3635.01 5350,3648 5299,3648 5261.75,3685.25 5261.75,3834.75 5284,3857 5521,3857 5800,4136 5800,4500
R36: "SA 56-11 RT3.5" R36.2 | length 400
  Top Layer w25: R36.2 6200,3900
pads on no net: esp32-pico-d4.1 esp32-pico-d4.2 esp32-pico-d4.3 esp32-pico-d4.21 esp32-pico-d4.23 esp32-pico-d4.28 esp32-pico-d4.29 esp32-pico-d4.38 esp32-pico-d4.39 esp32-pico-d4.40 K2.2 k6.1 mic.9 mic.12 mic.13 mic.15 mic.17

## Text inside footprints (layer, text, board x,y; h text height)
esp32-pico-d4: Top Overlay "FCS" at 3407.81,3307.81 h73.82; Top Overlay "5V" at 3207.81,1292.19 h73.82 r270; Top Overlay "FSD1" at 4207.81,3092.19 h73.82 r270; Top Overlay "3V3" at 4207.81,1292.19 h73.82 r270
k6: Top Overlay "1" at 5206.42,1415.87 h50; Top Overlay "3" at 5404.45,1228.86 h50; Top Overlay "2" at 5221.38,1296.57 h50